# EAGLE board ArduiNIX_Shield_v3_modified (EAGLE 6.4)
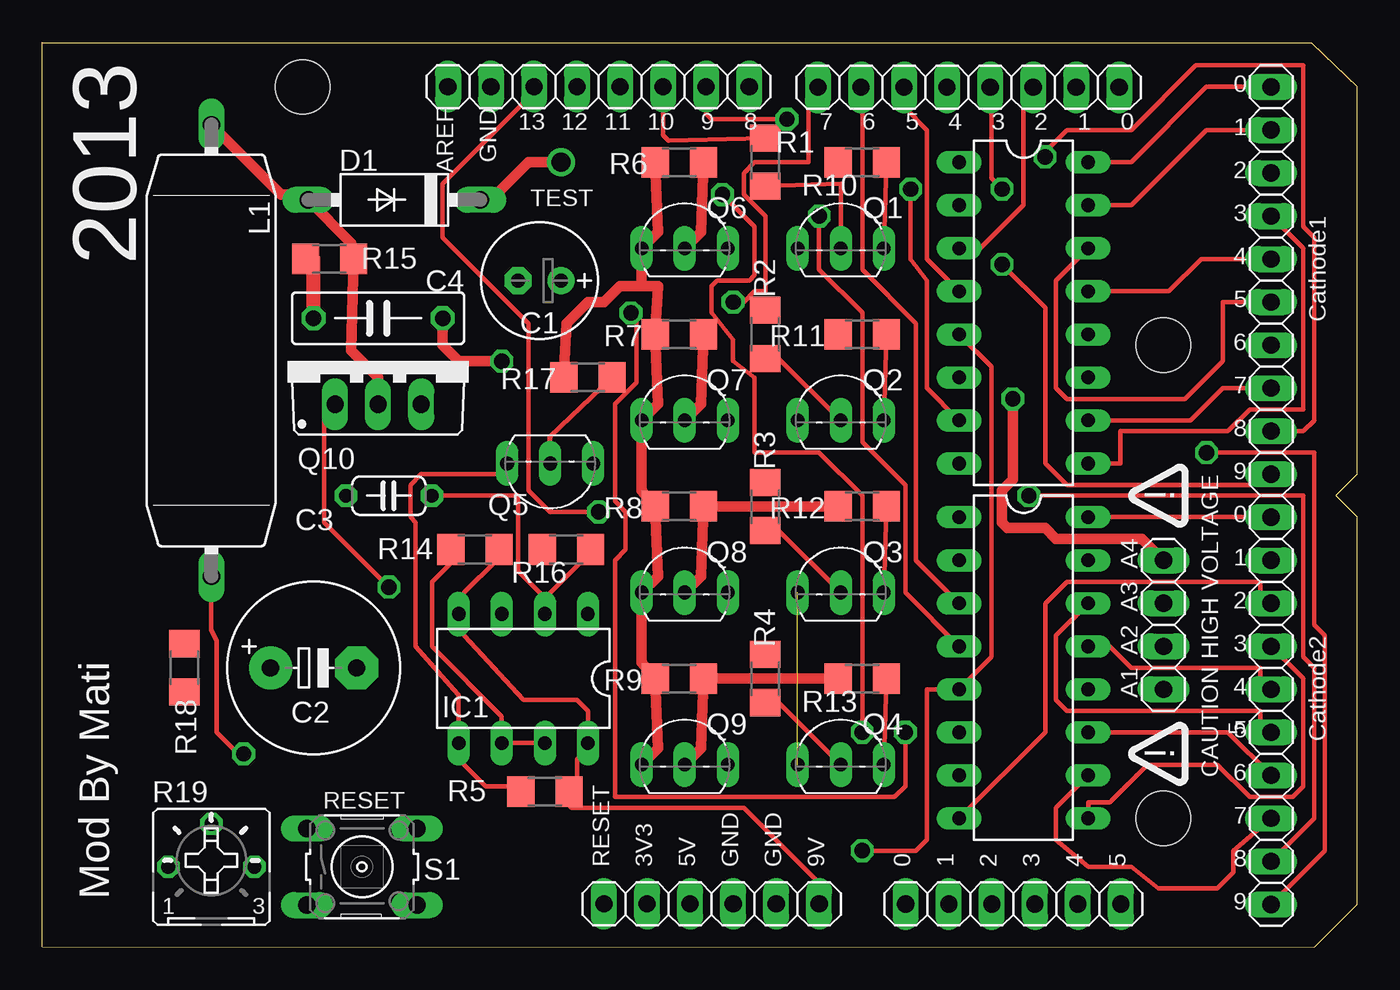
[diagram p0: board, top side]
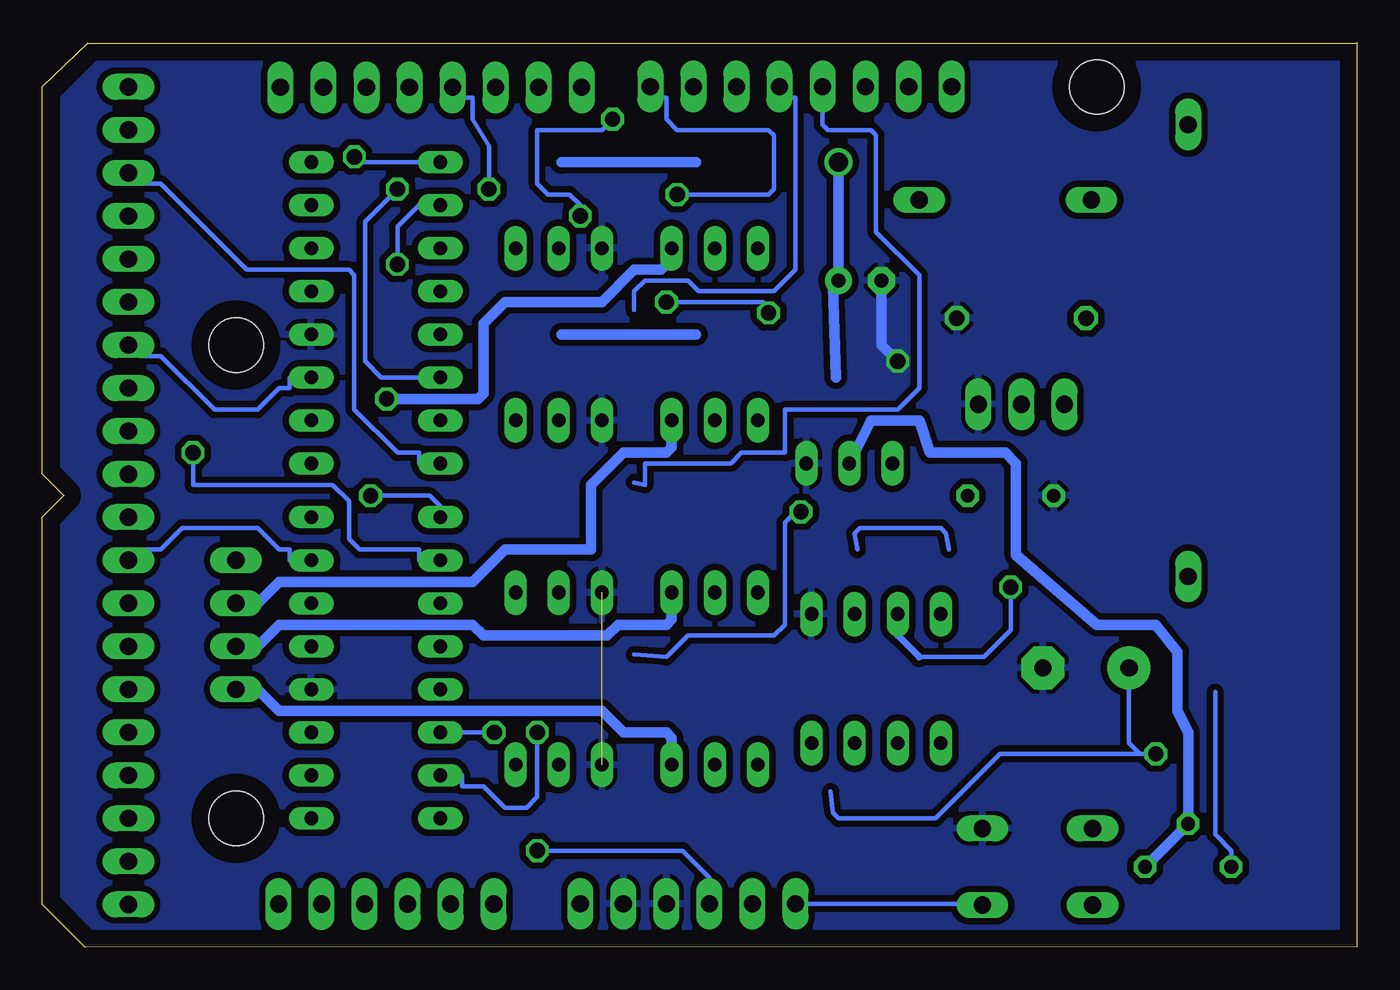
[diagram p1: board, bottom side, seen from below]

Size 77.6 x 53.43 mm. Coordinates in mm from the lower left corner, seen from the top.
Outline: 0,53.39 74.92,53.39 77.6,50.81 77.6,27.94 76.33,26.67 77.6,25.4 77.6,2.54 75.06,0 0,0.04 0,53.39
Outline: 0,53.39 0,53.43
Copper layers (1*16): Top 0.035mm / dielectric 1.5mm / Bottom 0.035mm
Design rules "default *": minimum track width 10mil, minimum drill 24mil, track to track 15mil, track to pad 12mil, pad to pad 8mil, via to via 8mil, smd to smd 8mil, copper to edge 40mil, drill to drill 8mil, minimum pad ring 10mil, minimum via ring 8mil, stop-mask expansion 4mil, vias tented up to drill 0mil, thermal gap 10mil
Holes 3.2 mm at 15.37,50.8 66.17,35.56 66.17,7.62

## Footprints (pad centres in the part's own frame; a part is rotated, then mirrored left to right if it is on the bottom)
E2,5-7 = drill 0.813 pad 1.6: + -1.27,0 | drill 0.813 pad 1.6 octagon: - 1.27,0
E5-10,5 = drill 1.016 pad 2.54: + -2.54,0 | drill 1.016 pad 2.54 octagon: - 2.54,0
C050-024X044 = drill 0.813 octagon: 1 -2.54,0; 2 2.54,0
C075-032X103 = drill 0.914 octagon: 1 -3.81,0; 2 3.81,0
1X10 = drill 1.016 long: 1 -11.43,0; 2 -8.89,0; 3 -6.35,0; 4 -3.81,0; 5 -1.27,0; 6 1.27,0; 7 3.81,0; 8 6.35,0; 9 8.89,0; 10 11.43,0
F126-10 = drill 1.016 long: A 5.08,0; C -5.08,0
DIL16 = drill 0.813 long: 1 -8.89,-3.81; 2 -6.35,-3.81; 3 -3.81,-3.81; 4 -1.27,-3.81; 5 1.27,-3.81; 6 3.81,-3.81; 7 6.35,-3.81; 8 8.89,-3.81; 9 8.89,3.81; 10 6.35,3.81; 11 3.81,3.81; 12 1.27,3.81; 13 -1.27,3.81; 14 -3.81,3.81; 15 -6.35,3.81; 16 -8.89,3.81
DIL-08 = drill 0.813 long: 1 -3.81,-3.81; 2 -1.27,-3.81; 3 1.27,-3.81; 4 3.81,-3.81; 5 3.81,3.81; 6 1.27,3.81; 7 -1.27,3.81; 8 -3.81,3.81
1X08 = drill 1.016 long: 1 -8.89,0; 2 -6.35,0; 3 -3.81,0; 4 -1.27,0; 5 1.27,0; 6 3.81,0; 7 6.35,0; 8 8.89,0
1X06 = drill 1.016 long: 1 -6.35,0; 2 -3.81,0; 3 -1.27,0; 4 1.27,0; 5 3.81,0; 6 6.35,0
1X04 = drill 1.016 long: 1 -3.81,0; 2 -1.27,0; 3 1.27,0; 4 3.81,0
MESC26 = drill 1.016 long: 1 -13.335,0; 2 13.335,0
TO92-CBE = drill 0.813 long: B 0,0; C 2.54,0; E -2.54,0
TO220BV = drill 1.016 long: D 0,-2.54; G -2.54,-2.54; S 2.54,-2.54
R1206 = smd 1.6 x 1.803: 1 -1.422,0; 2 1.422,0
B25P = drill 0.813 octagon: A -2.54,0; E 2.54,0; S 0,2.54
B3F-10XX = drill 1.016 long: 1 -3.251,2.261; 2 3.251,2.261; 3 -3.251,-2.261; 4 3.251,-2.261

## Placement (x,y rotation side)
C1  1uF 350v  [E2,5-7]  29.34,39.37 180 top
C2  470uF 25v  [E5-10,5]  16,16.51 0 top
C3  2n2  [C050-024X044]  20.45,26.67 180 top
C4  47pF  [C075-032X103]  19.81,37.15 0 top
CATHODE1  [1X10]  72.52,39.37 270 top
CATHODE2  [1X10]  72.52,13.97 270 top
D1  BYT01  [F126-10]  20.77,44.13 180 top
DRIVER1  74141N  [DIL16]  57.91,37.47 270 top
DRIVER2  74141N  [DIL16]  57.91,16.51 270 top
IC1  NE555  [DIL-08]  28.39,15.88 180 top
J1  [1X08]  54.67,50.78 180 top
J2  [1X06]  57.31,2.57 0 top
J3  [1X08]  32.83,50.82 180 top
JP2  [1X04]  66.17,19.05 270 top
JP3  [1X06]  39.5,2.58 0 top
L1  100uH 1A  [MESC26]  9.97,35.24 270 top
Q1  MPSA42  [TO92-CBE]  47.12,41.27 0 top
Q2  MPSA42  [TO92-CBE]  47.12,31.11 0 top
Q3  MPSA42  [TO92-CBE]  47.12,20.95 0 top
Q4  MPSA42  [TO92-CBE]  47.12,10.79 0 top
Q5  MPSA42  [TO92-CBE]  29.97,28.57 180 top
Q6  MPSA92  [TO92-CBE]  37.91,41.27 0 top
Q7  MPSA92  [TO92-CBE]  37.91,31.11 0 top
Q8  MPSA92  [TO92-CBE]  37.91,20.95 0 top
Q9  MPSA92  [TO92-CBE]  37.91,10.79 0 top
Q10  IRF740  [TO220BV]  19.81,34.61 0 top
R1  33k  [R1206]  42.68,46.35 90 top
R2  33k  [R1206]  42.68,36.2 90 top
R3  33k  [R1206]  42.68,26.04 90 top
R4  33k  [R1206]  42.68,15.88 90 top
R5  33k  [R1206]  29.66,9.21 0 top
R6  100k  [R1206]  37.6,46.35 180 top
R7  100k  [R1206]  37.6,36.2 180 top
R8  100k  [R1206]  37.6,26.04 180 top
R9  100k  [R1206]  37.6,15.88 180 top
R10  470k  [R1206]  48.39,46.35 180 top
R11  470k  [R1206]  48.39,36.2 180 top
R12  470k  [R1206]  48.39,26.04 180 top
R13  470k  [R1206]  48.39,15.88 180 top
R14  1k  [R1206]  25.53,23.5 0 top
R15  1k  [R1206]  16.96,40.64 0 top
R16  10k  [R1206]  30.93,23.5 180 top
R17  220k  [R1206]  32.2,33.66 180 top
R18  470  [R1206]  8.39,16.51 270 top
R19  [B25P]  9.97,4.76 0 top
S1  [B3F-10XX]  18.86,4.76 0 top

## Library data of the parts
C1-C4 R1-R18 = rcl
CATHODE1 CATHODE2 J1-J3 JP2 JP3 = pinhead
D1 = diode
DRIVER1 DRIVER2 = ic-package
IC1 = st-microelectronics
L1 = inductors
Q1-Q9 = transistor-pnp
Q10 = transistor-power
R19 = pot
S1 = switch-omron

## Nets
5V: DRIVER1.5 DRIVER2.5 JP3.3
GND: C1.- C2.- C3.2 C4.2 DRIVER1.12 DRIVER2.12 IC1.1 JP3.4 JP3.5 Q1.E Q2.E Q3.E Q4.E Q5.E Q10.S R18.1 S1.2
N$1: CATHODE2.2 DRIVER2.15
N$2: Q6.B R6.1 R10.2
N$3: CATHODE2.3 DRIVER2.8
N$4: DRIVER1.3 J1.3
N$5: DRIVER1.6 J1.4
N$6: DRIVER1.7 J1.5
N$7: CATHODE1.10 DRIVER1.2
N$8: C4.1 R15.1
N$9: DRIVER2.6 J1.8
N$10: DRIVER2.7 J3.1
N$11: DRIVER2.3 J1.7
N$12: CATHODE2.4 DRIVER2.9
N$13: CATHODE2.5 DRIVER2.13
N$14: CATHODE2.6 DRIVER2.14
N$15: CATHODE2.7 DRIVER2.11
N$16: CATHODE2.8 DRIVER2.10
N$17: CATHODE2.9 DRIVER2.1
N$18: CATHODE2.10 DRIVER2.2
N$19: C1.+ D1.C Q6.E Q7.E Q8.E Q9.E R6.2 R7.2 R8.2 R9.2 R17.2
N$20: CATHODE1.2 DRIVER1.15
N$21: CATHODE1.6 DRIVER1.14
N$22: CATHODE2.1 DRIVER2.16
N$23: DRIVER2.4 J3.2
N$24: DRIVER1.4 J1.6
N$25: CATHODE1.4 DRIVER1.9
N$26: CATHODE1.8 DRIVER1.10
N$27: CATHODE1.7 DRIVER1.11
N$28: CATHODE1.5 DRIVER1.13
N$29: CATHODE1.9 DRIVER1.1
N$30: Q1.B R1.1
N$31: Q2.B R2.1
N$32: Q3.B R3.1
N$33: J3.3 R1.2
N$34: J3.4 R2.2
N$35: J3.5 R3.2
N$36: Q1.C R10.1
N$37: Q2.C R11.1
N$38: Q3.C R12.1
N$39: JP2.1 Q6.C
N$40: JP2.2 Q7.C
N$41: JP2.3 Q8.C
N$42: Q7.B R7.1 R11.2
N$43: Q8.B R8.1 R12.2
N$44: CATHODE1.3 DRIVER1.8
N$45: D1.A L1.1 Q10.D R15.2
N$46: Q5.B R17.1 R19.E R19.S
N$47: R18.2 R19.A
N$49: Q9.B R9.1 R13.2
N$50: IC1.6 IC1.7 R14.1 R16.2
N$51: JP2.4 Q9.C
N$52: JP3.1 S1.4
N$53: IC1.3 Q10.G
N$54: IC1.5 Q5.C R5.1
N$56: C3.1 IC1.2 R16.1
N$58: Q4.C R13.1
N$59: Q4.B R4.1
N$60: J3.6 R4.2
N$61: CATHODE1.1 DRIVER1.16
VCC: C2.+ IC1.4 IC1.8 JP3.6 L1.2 R5.2 R14.2

## Tracks (layer width: path | path; a pad name or v marks a point on that pad's centre or on a via)
5V  (via drill 0.9)
  Top 0.254: DRIVER1.5 56.01,34.29 56.01,17.14 DRIVER2.5 52.2,15.24 52.2,6.35 51.57,5.71 v48.39,5.71
  Bottom 0.254: JP3.3 38.23,4.13 39.82,5.71 v48.39,5.71
GND  (via drill 0.9)  (1 unrouted)
  Top 0.61: C4.2 23.62,35.56 24.58,34.61 v27.12,34.61
  Bottom 0.61: C1.- 28.07,35.56 v27.12,34.61
  pour Bottom: 76.33,50.16 73.79,52.7 0.77,52.7 0.77,0.64 74.11,0.64 76.33,2.54 76.33,25.08 75.69,26.67 76.33,28.26
N$1
  Bottom 0.254: DRIVER2.15 63,22.86 63,23.5 63.63,23.5 64.9,24.77 69.34,24.77 70.61,23.5 71.88,23.5 CATHODE2.2
N$2
  Top 0.61: R6.1 38.87,42.23 Q6.B
  Bottom 0.61: R6.1 R10.2
N$3
  Top 0.254: DRIVER2.8 59.19,12.7 59.19,20.32 60.46,21.59 71.88,21.59 71.88,20.95 CATHODE2.3
N$4
  Top 0.254: J1.3 57.91,49.53 57.91,43.81 55.38,41.27 DRIVER1.3
N$5  (via drill 0.9)
  Top 0.254: J1.4 56.01,49.53 56.01,45.4 v56.65,44.77
  Bottom 0.254: DRIVER1.6 57.6,33.66 58.55,34.61 58.55,42.86 v56.65,44.77
N$6  (via drill 0.9)
  Top 0.254: DRIVER1.7 52.2,33.02 52.2,39.37 51.25,40.64 v51.25,44.77
  Bottom 0.254: J1.5 52.84,50.16 52.2,50.16 52.2,48.9 51.25,47.31 v51.25,44.77
N$7  (via drill 0.9)
  Top 0.254: CATHODE1.10 71.25,27.94 71.25,27.3 60.46,27.3 59.19,28.57 59.19,37.78 v56.65,40.32
  Bottom 0.254: DRIVER1.2 55.38,43.81 56.65,42.55 v56.65,40.32
N$8
  Top 0.254: 16,40.64 R15.1
  Top 0.813: C4.1 16,40.64
N$9  (via drill 0.9)
  Top 0.254: J1.8 45.22,49.53 45.22,46.35 42.04,46.35 41.41,45.72 41.41,44.45 42.68,43.18 42.68,38.73 42.04,38.73 41.41,38.1 v40.77,38.1 | v50.93,12.7 50.93,9.53 50.3,8.89 33.79,8.89 33.79,22.86 34.42,23.5 34.42,25.72 33.79,26.35 33.79,32.07 35.05,33.34 35.05,37.15 v34.74,37.47
  Bottom 0.254: v50.93,12.7 DRIVER2.6 | v34.74,37.47 35.05,38.1 v40.77,38.1
N$10  (via drill 0.9)
  Top 0.254: v48.39,12.7 48.39,26.67 45.85,29.21 42.04,29.21 42.04,33.66 40.77,34.61 40.77,35.88 39.5,37.47 39.5,39.05 39.82,39.37 41.72,39.37 42.04,39.69 42.04,42.55 v40.14,44.45
  Bottom 0.254: DRIVER2.7 52.84,10.16 52.84,9.53 51.57,9.53 50.3,8.26 49.03,8.26 48.39,8.89 v48.39,12.7 | J3.1 41.41,50.16 40.77,50.16 40.77,48.9 40.14,48.26 34.74,48.26 34.42,47.94 34.42,44.77 34.74,44.45 v40.14,44.45
N$11
  Top 0.254: DRIVER2.3 51.57,22.86 51.57,36.83 48.39,40.01 48.39,49.53 J1.7
N$12
  Top 0.254: DRIVER2.9 61.73,8.57 63,8.57 65.22,10.79 69.34,10.79 71.25,8.89 73.79,8.89 74.42,9.53 74.42,15.88 CATHODE2.4
N$13
  Top 0.254: DRIVER2.13 63,17.78 64.27,16.51 71.88,16.51 71.88,15.88 CATHODE2.5
N$14
  Top 0.254: DRIVER2.14 59.82,18.41 59.82,14.61 60.46,13.97 71.88,13.97 71.88,13.34 CATHODE2.6
N$15
  Top 0.254: DRIVER2.11 69.98,12.7 CATHODE2.7
N$16
  Top 0.254: DRIVER2.10 59.82,8.26 59.82,6.35 61.73,4.76 64.27,4.76 65.85,3.49 69.34,3.49 70.3,4.45 70.3,5.71 CATHODE2.8
N$17  (via drill 0.9)
  Top 0.254: CATHODE2.9 75.06,7.62 75.06,16.51 74.42,17.14 74.42,26.67 v58.23,26.67
  Bottom 0.254: DRIVER2.1 54.11,26.04 54.74,26.67 v58.23,26.67
N$18  (via drill 0.9)
  Top 0.254: CATHODE2.10 75.69,5.71 75.69,18.41 75.06,19.05 75.06,29.21 v68.71,29.21
  Bottom 0.254: DRIVER2.2 55.38,22.86 55.38,23.5 58.87,23.5 59.5,24.13 59.5,26.35 60.46,27.3 68.71,27.3 v68.71,29.21
N$19  (via drill 1.1)
  Top 0.61: R6.2 36.33,42.23 Q6.E 35.37,39.05 | 35.37,39.05 36.33,39.05 R7.2 36.33,32.07 Q7.E 35.37,26.99 R8.2 36.33,21.91 Q8.E 35.37,16.83 R9.2 36.33,11.75 Q9.E | D1.C 26.48,44.13 28.7,46.35 v30.61,46.35 | 35.37,39.05 34.1,39.05 33.15,38.1 32.2,38.1 30.93,36.83 R17.2
  Bottom 0.61: v30.61,46.35 C1.+ 30.93,39.05 R17.2
N$20
  Top 0.254: DRIVER1.15 64.27,43.81 68.71,48.26 CATHODE1.2
N$21
  Top 0.254: DRIVER1.14 59.82,39.37 59.82,33.02 60.46,32.38 67.44,32.38 69.66,34.61 69.66,38.1 CATHODE1.6
N$22
  Top 0.254: DRIVER2.16 CATHODE2.1
N$23  (via drill 0.9)
  Top 0.254: DRIVER2.4 50.93,20.95 50.93,27.3 48.39,29.84 48.39,37.47 45.85,40.01 v45.85,43.18 | J3.2 39.18,49.22 39.5,48.9 v43.95,48.9
  Bottom 0.254: v45.85,43.18 45.85,43.81 46.48,44.45 47.76,44.45 48.39,45.09 48.39,48.26 44.58,48.26 v43.95,48.9
N$24
  Top 0.254: DRIVER1.4 52.2,40.64 52.2,48.26 50.93,49.53 J1.6
N$25
  Top 0.254: DRIVER1.9 63.63,28.57 63.63,30.48 69.98,30.48 71.25,31.75 74.42,31.75 74.42,41.27 CATHODE1.4
N$26
  Top 0.254: DRIVER1.10 67.76,31.11 69.66,33.02 CATHODE1.8
N$27
  Bottom 0.254: DRIVER1.11 63,33.66 63,33.02 63.63,33.02 64.9,31.75 67.44,31.75 70.61,34.92 71.88,34.92 CATHODE1.7
N$28
  Top 0.254: DRIVER1.13 66.49,38.73 68.39,40.64 CATHODE1.5
N$29  (via drill 0.9)
  Top 0.254: CATHODE1.9 74.42,30.48 75.06,31.11 75.06,41.91 74.42,42.55 74.42,52.07 68.07,52.07 64.27,48.26 60.46,48.26 59.19,46.99 v59.19,46.67
  Bottom 0.254: DRIVER1.1 58.87,46.35 v59.19,46.67
N$30
  Top 0.254: R1.1 47.12,45.09 Q1.B
N$31
  Top 0.254: R2.1 43.31,34.92 Q2.B
N$32
  Top 0.254: R3.1 43.31,24.77 Q3.B
N$33
  Top 0.254: J3.3 36.64,47.95 36.96,47.62 R1.2
N$34
  Bottom 0.254: J3.4 33.79,50.16 33.15,50.16 33.15,40.01 34.42,38.73 38.87,38.73 39.5,39.37 42.04,39.37 42.68,38.73 R2.2
N$35
  Bottom 0.254: R3.2 42.04,27.3 42.04,28.57 36.96,28.57 36.33,29.21 33.79,29.21 33.79,31.75 27.12,31.75 25.85,33.02 25.85,39.69 28.39,42.23 28.39,47.94 28.7,48.26 31.24,48.26 31.56,48.58 J3.5
N$36
  Top 0.254: Q1.C R10.1
N$37
  Top 0.254: Q2.C R11.1
N$38
  Top 0.254: Q3.C R12.1
N$39  (via drill 0.9)
  Top 0.61: JP2.1 64.9,24.13 59.82,24.13 59.19,24.77 56.96,24.77 56.65,25.08 56.65,26.99 57.28,27.62 v57.28,32.38
  Bottom 0.61: Q6.C 40.45,40.64 41.09,40.01 42.68,40.01 44.58,38.1 50.3,38.1 51.57,36.83 51.57,32.7 51.88,32.38 v57.28,32.38
N$40
  Bottom 0.61: Q7.C 40.45,29.53 40.77,29.21 43.31,29.21 45.22,27.3 45.22,23.5 50.3,23.5 52.2,21.59 63.63,21.59 64.9,20.32 JP2.2
N$41
  Bottom 0.61: Q8.C 40.45,19.37 40.77,19.05 43.63,19.05 44.26,18.41 51.57,18.41 52.2,19.05 63.63,19.05 64.9,17.78 JP2.3
N$42
  Top 0.61: R7.1 38.87,32.07 Q7.B
  Bottom 0.61: R7.1 R11.2
N$43
  Top 0.61: Q8.B 38.87,21.91 R8.1 R12.2
N$44
  Bottom 0.254: DRIVER1.8 55.38,28.57 55.38,29.21 56.65,29.21 59.19,31.75 59.19,39.69 59.5,40.01 65.53,40.01 70.61,45.09 71.88,45.09 CATHODE1.3
N$45
  Top 0.61: Q10.D 19.81,33.66 18.23,35.24 R15.2 17.91,40.64 18.23,40.96 18.23,41.59 D1.A 15.37,44.45 14.1,44.45 L1.1
N$46
  Top 0.254: 29.97,30.16 R17.1
  Top 0.305: Q5.B 29.97,30.16
  Bottom 0.61: Q5.B 28.7,31.11 25.85,31.11 25.21,29.21 20.77,29.21 20.13,28.57 20.13,23.18 15.37,19.05 11.88,19.05 10.61,17.46 10.61,13.97 9.97,12.7 R19.S R19.E
N$47
  Bottom 0.254: R18.2 8.39,6.67 7.43,5.71 R19.A
N$49
  Top 0.61: Q9.B 38.87,11.75 R9.1 R13.2
N$50
  Top 0.254: IC1.7 IC1.6 27.12,13.65 22.99,17.78 22.99,21.59 24.26,22.86 R14.1
  Bottom 0.254: R14.1 24.26,24.45 24.58,24.77 29.34,24.77 29.66,24.45 R16.2
N$51
  Bottom 0.61: Q9.C 40.45,12.38 40.77,12.7 43.31,12.7 44.58,13.97 63.63,13.97 64.9,15.24 JP2.4
N$52
  Bottom 0.254: JP3.1 22.19,2.58 S1.4
N$53  (via drill 0.9)
  Top 0.254: Q10.G 16.64,31.11 16.64,25.08 v20.45,21.27
  Bottom 0.254: v20.45,21.27 20.45,18.73 22.04,17.14 25.85,17.14
  Bottom 0.406: 25.85,17.14 27.12,18.41 IC1.3
N$54
  Top 0.254: R5.1 28.07,9.53 26.16,9.53 24.58,11.11 IC1.5 24.58,14.92 24.26,15.24 22.04,17.78 22.04,25.08 21.72,25.4 21.72,27.3 22.36,27.94 26.8,27.94 Q5.C
N$56
  Top 0.254: 29.66,20.64 28.07,22.23 28.07,26.67 C3.1 | 29.66,20.64 IC1.2 | R16.1 32.2,23.18 29.66,20.64
N$58
  Top 0.254: Q4.C R13.1
N$59
  Top 0.254: R4.1 43.31,14.61 Q4.B
N$60  (via drill 0.9)
  Top 0.254: J3.6 28.7,50.16 23.62,45.09 23.62,41.91 28.7,36.83 28.7,26.99 29.97,25.72 v32.83,25.72
  Bottom 0.254: v32.83,25.72 33.15,25.72 33.79,25.08 33.79,19.05 34.42,18.41 39.5,18.41 40.77,17.14 R4.2
N$61
  Top 0.254: DRIVER1.16 64.27,46.35 68.71,50.8 CATHODE1.1
VCC  (via drill 0.9)
  Top 0.254: R14.2 26.8,22.86 24.89,20.95 IC1.4 24.89,18.41 28.39,14.61 31.56,14.61 32.2,13.97 IC1.8 32.2,11.75 31.56,11.11 31.56,9.84 R5.2 30.93,8.57 31.24,8.26 41.41,8.26 45.85,3.81 JP3.6 | L1.2 9.97,18.73 10.29,18.1 10.29,12.7 11.56,11.43 v11.88,11.43
  Bottom 0.254: C2.+ 13.47,12.06 12.83,11.43 | R5.2 30.93,7.94 30.61,7.62 24.89,7.62 21.08,11.43 12.83,11.43 | v11.88,11.43 12.83,11.43

## Text on the board
tPlace: ! | !
tNames: 0 | 13 | 12 | 11 | 10 | 9 | 8 | 7 | 6 | 5 | 4 | 3 | 2 | 1 | 0 | 1 | AREF | GND | TEST | 2 | 3 | Cathode1 | 2013 | 4 | 5 | 6 | 7 | 8 | CAUTION HIGH VOLTAGE | 9 | 0 | A4 | 1 | A3 | 2 | A2 | Cathode2 | A1 | 3 | 4 | 5 | 5 | 6 | RESET | 7 | RESET | 3V3 | 5V | GND | GND | 9V | 0 | 1 | 2 | 3 | 4 | 5 | 8 | Mod By Mati | 9